# Altium PCB mother1.PcbDoc
Units mm, origin at the board's own origin, x right, y up, seen from the top; angles counter-clockwise.
Board outline 189.99 x 140.08 mm, 3 copper layers (Top Layer, Mid-Layer 24, Bottom Layer); 74 components, 76 nets, 310 pads, 0 vias.
Unrouted connection lines stored in the file: 148.
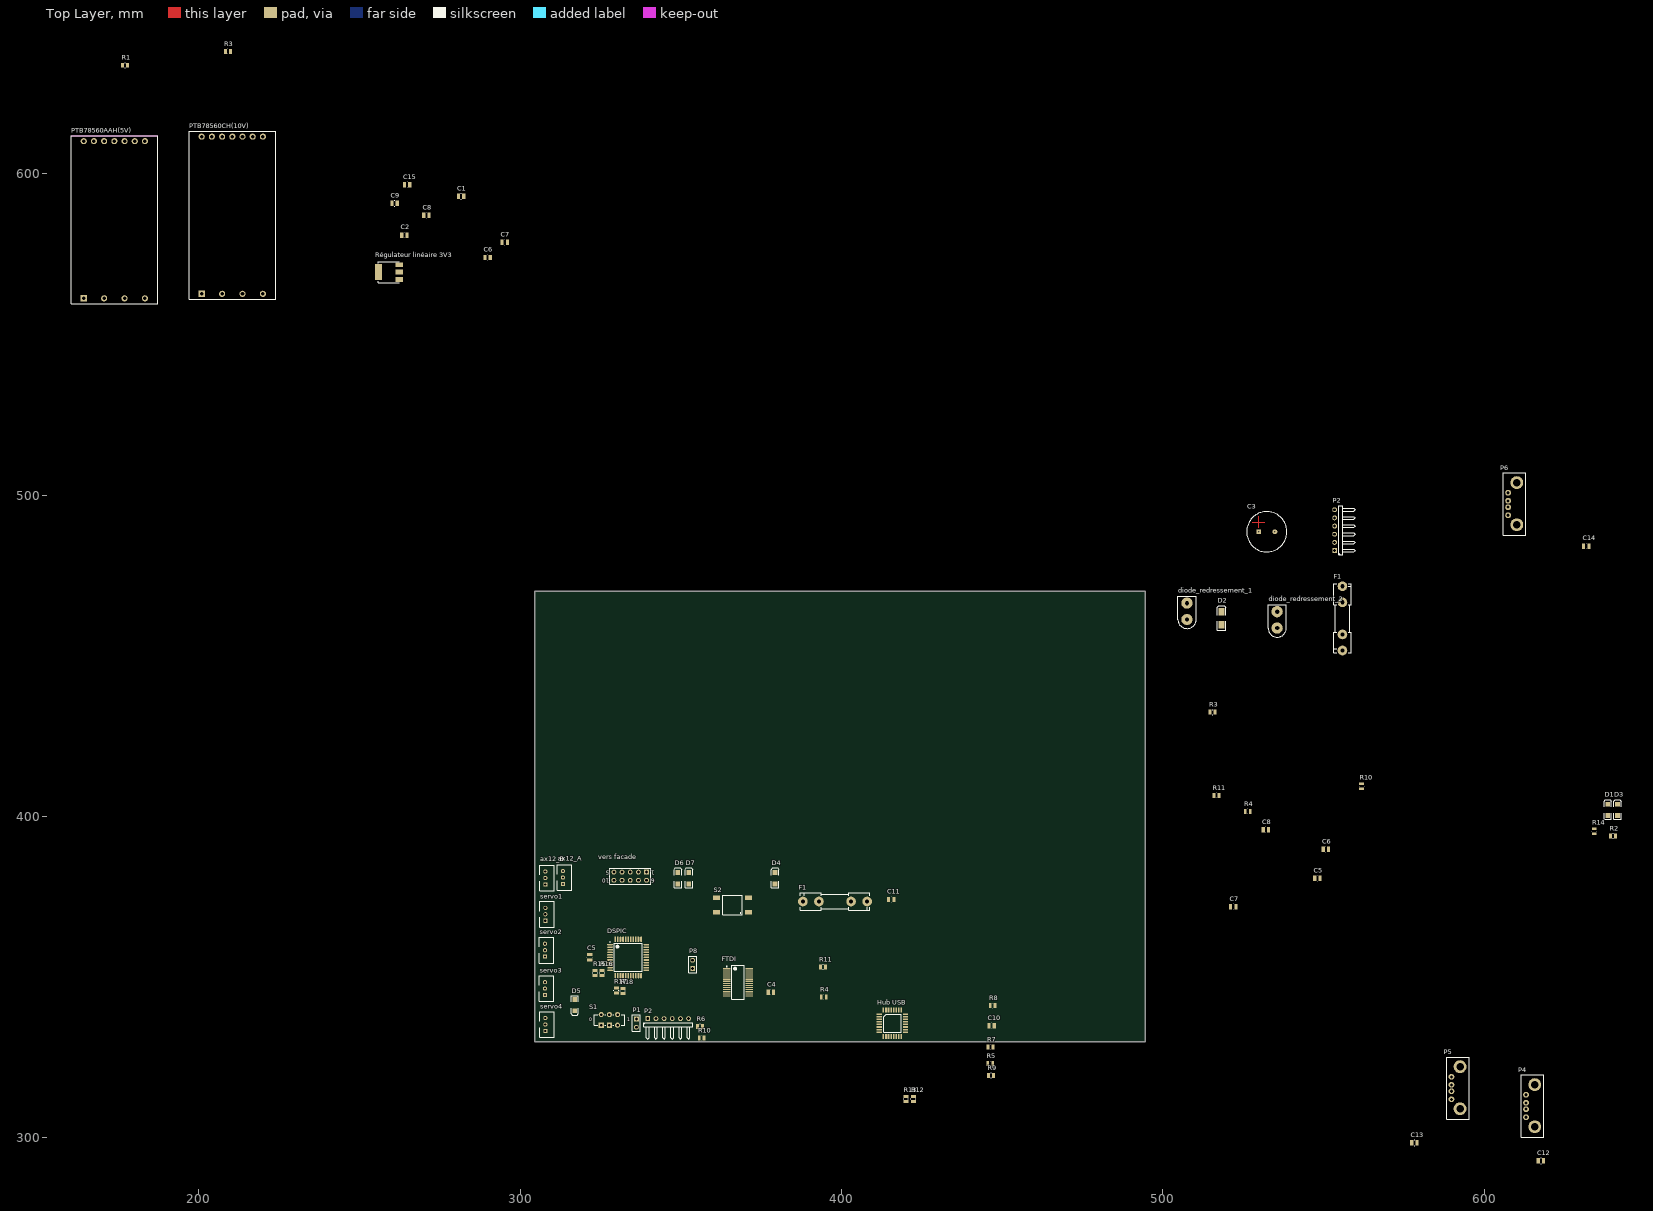
[diagram p0: Top Layer view]
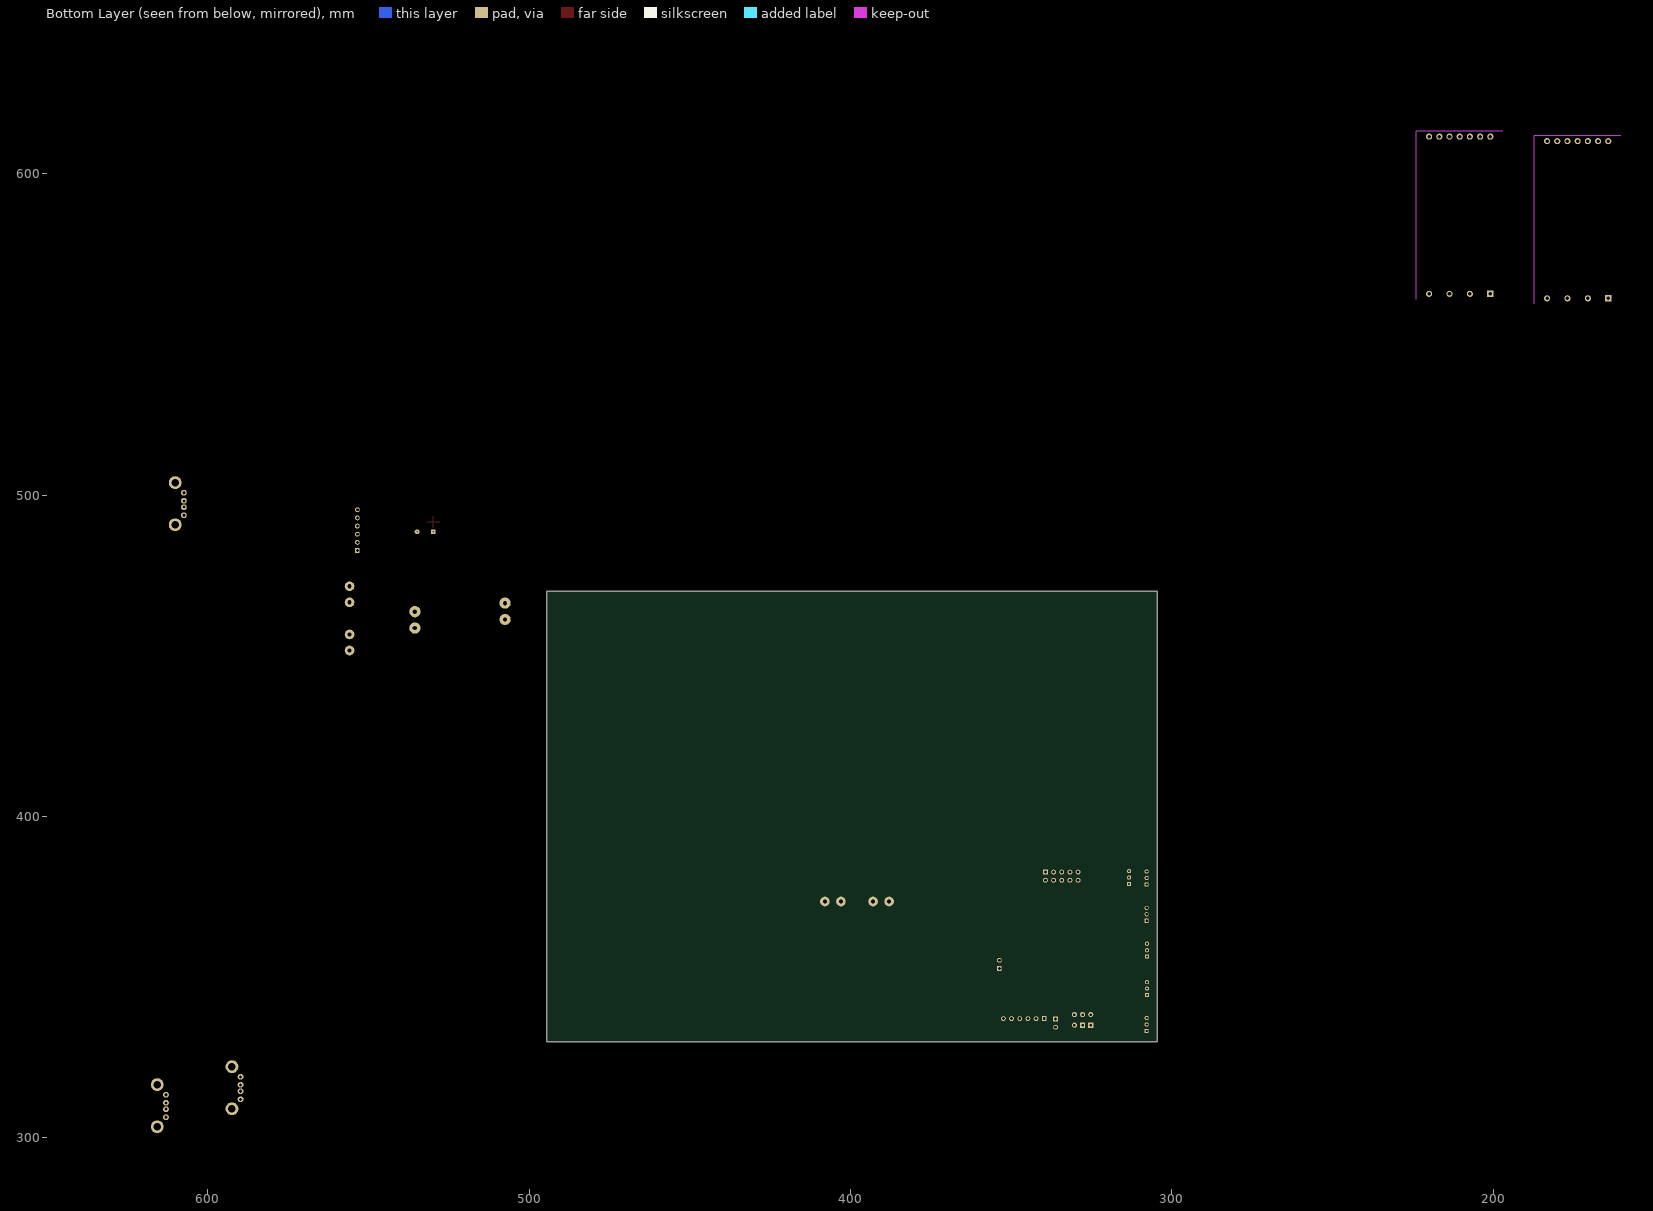
[diagram p1: Bottom Layer view, seen from below]
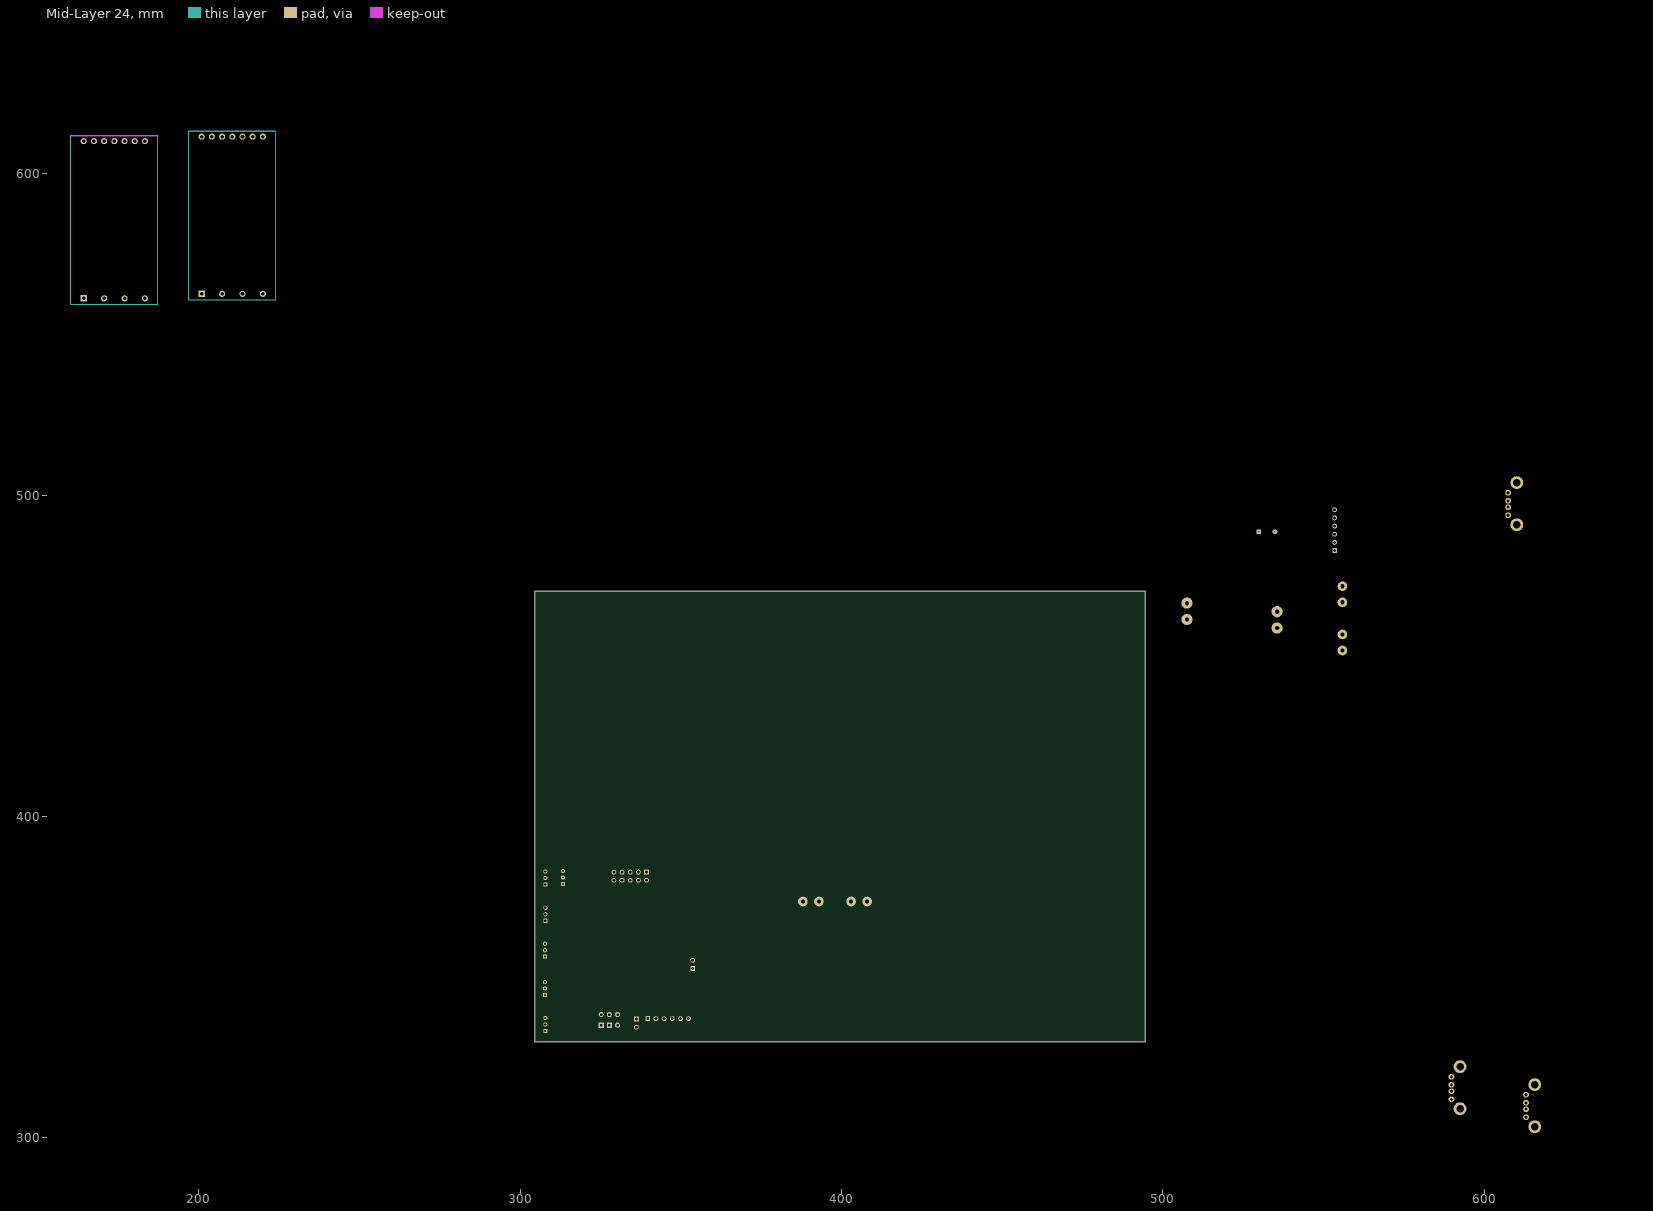
[diagram p2: Mid-Layer 24]

## Layer stack, top to bottom
Top Layer: signal copper 0.0356
Dielectric: dielectric 0.32, FR-4, Dk 4.8
Mid-Layer 24: signal copper 0.0356
Dielectric: dielectric 0.32, FR-4, Dk 4.8
Bottom Layer: signal copper 0.0356

## Board outline
304.546,329.946 494.538,329.946 494.538,470.027 304.546,470.027

## Design rules (kind name [scope] priority, off if disabled: settings)
AssemblyTestPointUsage AssemblyTestPointUsage_1 [All] p2:
AssemblyTestpoint AssemblyTestpoint_1 [All] p2: testpointundercomponent=TRUE minsize=1.016 maxsize=2.54 preferedsize=1.524 minholesize=0 maxholesize=1.016 preferedholesize=0.813 testpointgrid=0.025 usegrid=TRUE gridtolerance=0 allowsidetop=TRUE allowsidebottom=TRUE
Clearance [All] p1: gap=0.2
ComponentClearance ComponentClearance_1 [All] p2: gap=0.254 collisioncheckmode=3 verticalgap=0.254 showdistances=FALSE
DiffPairsRouting DiffPairsRouting_1 [All] p2: maxlimit=0.254 minlimit=0.254 mostfreqgap=0.254 maxuncoupledlength=12.7
FabricationTestPointUsage TestPointUsage [All] p2: valid=0 allowmultiple=FALSE
FabricationTestpoint Testpoint [All] p2: side=3 testpointundercomponent=TRUE minsize=1.016 maxsize=2.54 preferedsize=1.524 minholesize=0 maxholesize=1.016 preferedholesize=0.813 testpointgrid=0.025 allowsidetop=TRUE allowsidebottom=TRUE usegrid=TRUE gridtolerance=0
FanoutControl Fanout_LCC [IsLCC] p1: bgadir=Out bgaviamode=Centered fanoutstyle=Auto fanoutdirection=Alternating viagrid=0.025 // Fanout_LCC (Default Rule)
FanoutControl Fanout_BGA [IsBGA] p2: bgadir=Out bgaviamode=Centered fanoutstyle=Auto fanoutdirection=Alternating viagrid=0.025 // Fanout_BGA (Default Rule)
FanoutControl Fanout_Small [(CompPinCount < 5)] p3: bgadir=Out bgaviamode=Centered fanoutstyle=Auto fanoutdirection=OutThenIn viagrid=0.025 // Fanout_Small (Default Rule)
FanoutControl Fanout_SOIC [IsSOIC] p4: bgadir=Out bgaviamode=Centered fanoutstyle=Auto fanoutdirection=Alternating viagrid=0.025 // Fanout_SOIC (Default Rule)
FanoutControl Fanout_BGA_1 [IsBGA] p6: bgadir=Out bgaviamode=Centered fanoutstyle=Auto fanoutdirection=Alternating viagrid=0.025 // Fanout_BGA (Default Rule)
FanoutControl Fanout_LCC_1 [IsLCC] p7: bgadir=Out bgaviamode=Centered fanoutstyle=Auto fanoutdirection=Alternating viagrid=0.025 // Fanout_LCC (Default Rule)
FanoutControl Fanout_SOIC_1 [IsSOIC] p8: bgadir=Out bgaviamode=Centered fanoutstyle=Auto fanoutdirection=Alternating viagrid=0.025 // Fanout_SOIC (Default Rule)
FanoutControl Fanout_Small_1 [(CompPinCount < 5)] p9: bgadir=Out bgaviamode=Centered fanoutstyle=Auto fanoutdirection=OutThenIn viagrid=0.025 // Fanout_Small (Default Rule)
FanoutControl Fanout_Default_1 [All] p10: bgadir=Out bgaviamode=Centered fanoutstyle=Auto fanoutdirection=Alternating viagrid=0.025 // Fanout_Default (Default Rule)
Height Height_1 [All] p2: minheight=0 maxheight=25.4 prefheight=12.7
HoleSize HoleSize_1 [All] p2: absolutevalues=TRUE maxlimit=2.54 minlimit=0.025 maxpercent=80.000 minpercent=20.000
HoleToHoleClearance HoleToHoleClearance_1 [All] p2: gap=0.254 allowstackedmicrovias=TRUE
LayerPairs LayerPairs_1 [All] p2: enforce=TRUE
MinimumSolderMaskSliver MinimumSolderMaskSliver_1 [All] p2: minsoldermaskwidth=0.254
NetAntennae NetAntennae_1 [All] p2: netantennaetolerance=0
PasteMaskExpansion PasteMaskExpansion_1 [All] p2: expansion=0
PlaneClearance PlaneClearance_1 [All] p2: clearance=0.508
PolygonConnect [All] p1: connectstyle=Relief reliefconductorwidth=0.254 reliefentries=4 polygonreliefangle="90 Angle"
PolygonConnect PolygonConnect_1 [All] p2: connectstyle=Relief reliefconductorwidth=0.254 reliefentries=4 polygonreliefangle="90 Angle"
RoutingLayers [All] p1: top layer_v5=TRUE mid layer 24_v5=FALSE bottom layer_v5=TRUE
RoutingPriority RoutingPriority_1 [All] p2: routingpriority=0
RoutingTopology RoutingTopology_1 [All] p2: topology=Shortest
RoutingVias [All] p1: holewidth=0.5 width=1 viastyle="Through Hole" minholewidth=0.711 minwidth=1.27 maxholewidth=0.711 maxwidth=1.27
ShortCircuit ShortCircuit_1 [All] p2: allowed=FALSE
SilkToSilkClearance SilkToSilkClearance_1 [All] p2: silktosilkclearance=0.254
SilkscreenOverComponentPads [All] p1: minsilkscreentomaskgap=0.254
SilkscreenOverComponentPads SilkscreenOverComponentPads_1 [All] p2: minsilkscreentomaskgap=0.254
SolderMaskExpansion [All] p1: expansion=0.102
SolderMaskExpansion SolderMaskExpansion_1 [All] p2: expansion=0.102
UnRoutedNet UnRoutedNet_1 [All] p2:
Width [All] p1: maxlimit=0.2 minlimit=0.2 preferedwidth=0.2
22 further rules are at their usual default settings.

## Classes and differential pairs
component class U_mother1-pic: ax12_A ax12_B C4 C5 C6 C7 C8 C9 C11 D1 D2 D3 D4 D5 D6 DSPIC F1 FTDI P2 P8 R2 R3 R4 R10 R11 R14 R15 R16 R17 R18 "Régulateur linéaire 3V3" S1 S2 servo1 servo2 servo3 servo4 "vers facade"
component class mother1: C1 C2 C3 C5 C6 C10 C12 C13 C14 C15 diode_redressement_1 diode_redressement_2 F1 "Hub USB" P1 P2 P4 P5 P6 "Power distribution USB" PTB78560AAH(5V) PTB78560CH(10V) R1 R3 R4 R5 R6 R7 R8 R9 R10 R11 R12 R13

## Components (designator, comment, footprint, x,y, rotation, side; value= is the part's Value field where it differs from the comment)
ax12_A "JST" B3B-PH-K-S 313.309,378.968 r90 top
ax12_B "JST" B3B-PH-K-S 307.848,378.841 r90 top
C1 "CAP" C0805C 280.797,592.963 r0 top
C2 "CAP" C0805C 263.144,580.898 r0 top
C3 "CAP POL" "Capacitor axial leaded" 529.844,488.569 r0 top
C4 "" C0805C 377.19,345.313 r0 top
C5 "" C0805C 321.691,355.346 r90 top
C5 "" C0805C 547.243,380.746 r0 top
C6 "" C0805C 289.052,573.913 r0 top
C6 "" C0805C 549.91,389.763 r0 top
C7 "" C0805C 294.386,578.612 r0 top
C7 "" C0805C 521.081,371.856 r0 top
C8 "" C0805C 270.002,586.994 r0 top
C8 "" C0805C 531.241,395.859 r0 top
C9 "" C0805C 260.096,590.804 r0 top
C10 "CAP" C0805C 445.897,334.899 r0 top
C11 "CAP" C0805C 414.655,374.142 r0 top
C12 "CAP" C0805C 616.839,292.862 r0 top
C13 "CAP" C0805C 577.469,298.45 r0 top
C14 "CAP" C0805C 630.936,484.124 r0 top
C15 "CAP" C0805C 264.033,596.519 r0 top
D1 "LED2" LED1206G 638.439,402.011 r90 top
D2 "ZENER/5.6V" DSO-C2/X1.8 518.287,461.645 r90 top
D3 "LED2" LED1206Y 641.447,402.011 r90 top
D4 "LED2" LED1206Y 379.349,380.746 r90 top
D5 "LED2" LED1206R 316.992,341.249 r270 top
D6 "LED2" LED1206R 349.069,380.746 r90 top
D7 "LED2" LED1206R 352.498,380.746 r90 top (schematic designator D6)
diode_redressement_1 "Diode" "Diode axial lead \"folded\"" 507.492,461.264 r90 top
diode_redressement_2 "Diode" "Diode axial lead \"folded\"" 535.559,458.597 r90 top
DSPIC "DSPIC33FJ64MC804-I/PT" TQFP-PT44_N 333.629,356.108 r0 top
F1 "200mA" "Fuse Holder 5x20mm" 387.985,373.507 r0 top
F1 "200mA" "Fuse Holder 5x20mm" 555.879,451.612 r90 top
FTDI "FT232RL" SSOP-28_M 367.792,348.361 r0 top
"Hub USB" "TUSB2046BVF" TUSB2046BVF 411.734,338.455 r0 top
P1 "Header 2" HDR1X2 336.169,336.931 r270 top
P2 "PICkit" HDR1X6H 339.725,337.058 r0 top
P2 "PICkit" HDR1X6H 553.466,482.727 r90 top
P4 "USB" "USB SM female vertical" 613.029,309.88 r90 top
P5 "USB" "USB SM female vertical" 589.788,315.468 r90 top
P6 "USB" "USB SM female vertical" 607.441,497.205 r90 top
P8 "Header 2/Spy" HDR1X2 353.695,352.679 r90 top
PTB78560AAH(5V) "PTB78560x" PTB78560x 164.211,561.213 r90 top
PTB78560CH(10V) "PTB78560x" PTB78560x 200.914,562.61 r90 top
R1 "RES" C0805R 176.276,633.73 r0 top
R2 "" C0805R 639.318,393.954 r0 top
R3 "" C0805R 208.28,638.048 r0 top
R3 "" C0805R 514.708,432.433 r0 top
R4 "" C0805R 393.7,343.789 r0 top
R4 "" C0805R 525.653,401.574 r0 top
R5 "RES" C0805R 445.516,323.088 r0 top
R6 "RES" C0805R 355.219,334.645 r0 top
R7 "RES" C0805R 445.643,328.168 r0 top
R8 "RES" C0805R 446.278,341.122 r0 top
R9 "RES" C0805R 445.77,319.405 r0 top
R10 "" C0805R 355.727,331.089 r0 top
R10 "" C0805R 561.855,408.602 r90 top
R11 "" C0805R 393.446,353.187 r0 top
R11 "" C0805R 515.874,406.527 r0 top
R12 "RES" C0805R 422.334,311.32 r90 top
R13 "RES" C0805R 420.073,311.32 r90 top
R14 "" C0805R 634.238,394.589 r90 top
R15 "" C0805R 323.342,350.52 r90 top
R16 "" C0805R 325.501,350.52 r90 top
R17 "" C0805R 329.946,345.059 r90 top
R18 "" C0805R 331.978,344.932 r90 top
"Régulateur linéaire 3V3" "LM2937IMP-3.3" SOT223 262.382,567.055 r90 top
S1 "SW-DPDT/Reset" MCLSS22 327.787,335.026 r0 top
S2 "SPST-NO/RC2" SPST-NO 371.094,370.205 r90 top
servo1 "JST" B3B-PH-K-S 307.848,367.538 r90 top
servo2 "JST" B3B-PH-K-S 307.721,356.362 r90 top
servo3 "JST" B3B-PH-K-S 307.721,344.424 r90 top
servo4 "JST" B3B-PH-K-S 307.848,333.248 r90 top
"vers facade" "IDC 10" HDR2X5_CEN 339.344,382.651 r180 top

## Footprints (in the part's own frame and the unit in brackets; to place one, negate y for a bottom-side part, rotate by r counter-clockwise, add the part's x,y. Pads: shape width x height; smd on the part's side, far side on the other; paste and mask are expansions set on the pad)
B3B-PH-K-S [mm] "JST Header 3 pins Straight"
  rect 1.3x1.3 hole 0.7: 1(0,0)
  round 1.3 hole 0.7: 2(2,0) 3(4,0)
  silkscreen extent -2,-2.8 6,1.7, body extent -1.95,-2.8 5.95,1.7, height 6
C0805C [mm]
  rect 1x1.7 smd: 1(0,0) 2(1.65,0)
  silkscreen extent 0.8,-0.89 0.85,0.89, body extent -0.21,-0.61 1.79,0.64, height 0.78
C0805R [mm]
  rect 0.9x1.55 smd: 1(0,0) 2(1.55,0)
  silkscreen extent 0.73,-0.76 0.81,0.76, body extent -0.24,-0.62 1.76,0.63, height 0.78
"Capacitor axial leaded" [mil] "height x diam 20mm x 12.5mm"
  rect 60x60 hole 19.68: 0(0,0)
  round 60 hole 19.68: 0(196.85,0)
  Top Layer lines w10: -76.77,118.11 72.83,118.11 ; 0,51.18 0,187.01
  silkscreen extent -148,-246 345,246, body extent -148,-246 343,246, height 788
"Diode axial lead \"folded\"" [mm]
  round 3.5 hole 1.35: 1(0,0) 2(5.1,0)
  silkscreen extent -2.81,-2.85 7.25,2.8, body extent -2.8,-2.8 5.74,2.8, height 15.69
DSO-C2/X1.8 [mm] "Diode; DO-214-AC/SMA; 2 C-Bend Leads; Body 5 x 2.7 mm, inc. leads (LxW)"
  rect 2.4x1.8 smd: A(2.05,0) K(-2.05,0)
  silkscreen extent -3.65,-1.3 3.95,1.3, body extent -2.74,-1.4 2.74,1.4, height 2.28
"Fuse Holder 5x20mm" [mm] "Schurter Fuse Holder 0751.0110"
  round 3 hole 1.3: 1(0,0) 1(5,0) 2(15,0) 2(20,0)
  silkscreen extent -0.75,-2.75 20.75,2.75, body extent 0,-2.5 20,2.5, height 6.4
HDR1X2 [mm] "Connector; Header; 2 Position"
  rect 1.5x1.5 hole 0.9: 1(0,0)
  round 1.5 hole 0.9: 2(2.54,0)
  silkscreen extent -1.27,-1.27 3.81,1.27, body extent -1.27,-1.27 3.81,1.27, height 8.45
HDR1X6H [mm] "Connector; Header; 6 Position; Right Angle"
  rect 1.5x1.5 hole 0.9: 1(0,0)
  round 1.5 hole 0.9: 2(2.54,0) 3(5.08,0) 4(7.62,0) 5(10.16,0) 6(12.7,0)
  silkscreen extent -1.27,-6.35 13.97,-1.27, body extent -1.27,-10.15 13.97,0.32, height 3.08
HDR2X5_CEN [mm] "Connector; Header; 5x2 Position"
  rect 1.5x1.5 hole 0.9: 1(0,0)
  round 1.5 hole 0.9: 2(2.54,0) 3(5.08,0) 4(7.62,0) 5(10.16,0) 6(0,2.54) 7(2.54,2.54) 8(5.08,2.54) 9(7.62,2.54) 10(10.16,2.54)
  silkscreen extent -1.27,-1.27 11.43,3.81, body extent -5.15,-3.3 15.35,6, height 2.2
LED1206G [mm] "SMT LED; 2 Flat Leads; 3.2X1.6X1.1"
  rect 1.5x1.5 smd: 1(-1.75,0) 2(1.75,0)
  silkscreen extent -2.9,-1.15 3.2,1.15, body extent -1.6,-0.8 1.6,0.8, height 1.11
LED1206R [mm] "SMT LED; 2 Flat Leads; 3.2X1.6X1.1"
  rect 1.5x1.5 smd: 1(-1.75,0) 2(1.75,0)
  silkscreen extent -2.9,-1.15 3.2,1.15, body extent -1.6,-0.8 1.6,0.8, height 1.11
LED1206Y [mm] "SMT LED; 2 Flat Leads; 3.2X1.6X1.1"
  rect 1.5x1.5 smd: 1(-1.75,0) 2(1.75,0)
  silkscreen extent -2.9,-1.15 3.2,1.15, body extent -1.6,-0.8 1.6,0.8, height 1.11
MCLSS22 [mm] "Slide Switch DPDT"
  rect 1.6x1.6 hole 0.8: 1(0,0) 2(-2.54,0)
  round 1.6 hole 0.8: 3(2.54,0) 4(0,3.3) 5(-2.54,3.3) 6(2.54,3.3)
  silkscreen extent -4.7,0 4.7,3.3, body extent -4.7,-2 4.7,3.3, height 3.5
PTB78560x [mm] "PTB78560x Texas Instruments Regulator"
  rect 1.905x1.905 hole 1.1: 1(0,0)
  round 1.905 hole 1.1: 2(0,-6.35) 3(0,-12.7) 4(0,-19.05) 5(48.895,-19.05) 6(48.895,-15.875) 7(48.895,-12.7) 8(48.895,-9.525) 9(48.895,-6.35) 10(48.895,-3.175) 11(48.895,0)
  Mid-Layer 24 lines w0.2: -1.778,4 -1.778,-23.05 50.673,-23.05 50.673,4.001 -1.778,4
  Keep-Out Layer lines w0.2: 50.609,3.937 50.609,-22.987 -1.714,-22.987
  silkscreen extent -1.71,-22.99 50.61,3.94, body extent -1.71,-22.99 50.61,3.94, height 10
SOT223 [mm]
  rect 1.5x2.2 smd: 1(0,0) 2(2.3,0) 3(4.6,0)
  rect 5x2.2 smd: ""(2.3,6.5)
  silkscreen extent -1,0 5.6,6.6, body extent -0.95,-0.2 5.55,6.8, height 1.64
SPST-NO [mm] "Tactile Switch SPST-NO 6x6mm"
  rect 1.4x2.1 smd: 1(0,0) 2(4.5,0) 3(4.5,10) 4(0,10)
  silkscreen extent -0.75,2 5.25,8, body extent -0.75,0.93 5.25,9.08, height 5
SSOP-28_M [mm] "SOP, 28-Leads, Body 10.2x5.3mm, Pitch 0.65mm, IPC Low Density"
  oval 2.4x0.35 smd: 1(-3.5,4.225) 2(-3.5,3.575) 3(-3.5,2.925) 4(-3.5,2.275) 5(-3.5,1.625) 6(-3.5,0.975) 7(-3.5,0.325) 8(-3.5,-0.325) 9(-3.5,-0.975) 10(-3.5,-1.625) 11(-3.5,-2.275) 12(-3.5,-2.925) 13(-3.5,-3.575) 14(-3.5,-4.225) 15(3.5,-4.225) 16(3.5,-3.575) 17(3.5,-2.925) 18(3.5,-2.275) 19(3.5,-1.625) 20(3.5,-0.975) 21(3.5,-0.325) 22(3.5,0.325) 23(3.5,0.975) 24(3.5,1.625) 25(3.5,2.275) 26(3.5,2.925) 27(3.5,3.575) 28(3.5,4.225)
  silkscreen extent -3.62,-5.25 1.9,5.25, body extent -3.91,-5.1 3.91,5.1, height 1.98
TQFP-PT44_N [mm] "Thin QFP, 44-Leads, Body 10x10mm, Pitch 0.8mm, IPC Medium Density"
  oval 1.75x0.5 smd: 1(-5.65,4) 2(-5.65,3.2) 3(-5.65,2.4) 4(-5.65,1.6) 5(-5.65,0.8) 6(-5.65,0) 7(-5.65,-0.8) 8(-5.65,-1.6) 9(-5.65,-2.4) 10(-5.65,-3.2) 11(-5.65,-4) 23(5.65,-4) 24(5.65,-3.2) 25(5.65,-2.4) 26(5.65,-1.6) 27(5.65,-0.8) 28(5.65,0) 29(5.65,0.8) 30(5.65,1.6) 31(5.65,2.4) 32(5.65,3.2) 33(5.65,4)
  oval 0.5x1.75 smd: 12(-4,-5.65) 13(-3.2,-5.65) 14(-2.4,-5.65) 15(-1.6,-5.65) 16(-0.8,-5.65) 17(0,-5.65) 18(0.8,-5.65) 19(1.6,-5.65) 20(2.4,-5.65) 21(3.2,-5.65) 22(4,-5.65) 34(4,5.65) 35(3.2,5.65) 36(2.4,5.65) 37(1.6,5.65) 38(0.8,5.65) 39(0,5.65) 40(-0.8,5.65) 41(-1.6,5.65) 42(-2.4,5.65) 43(-3.2,5.65) 44(-4,5.65)
  silkscreen extent -5.77,-4.35 4.35,4.95, body extent -6,-6 6,6, height 1.05
TUSB2046BVF [mil] "TI 4-Port USB Hub"
  rect 63x19.7 smd: 1(0,0) 2(0,-31.5) 3(0,-63) 4(0,-94.5) 5(0,-125.9) 6(0,-157.4) 7(0,-188.9) 8(0,-220.4) 17(322.8,-220.4) 18(322.8,-188.9) 19(322.8,-157.4) 20(322.8,-125.9) 21(322.8,-94.5) 22(322.8,-63) 23(322.8,-31.5) 24(322.8,0)
  rect 19.7x63 smd: 9(51.2,-271.6) 10(82.7,-271.6) 11(114.2,-271.6) 12(145.7,-271.6) 13(177.1,-271.6) 14(208.6,-271.6) 15(240.1,-271.6) 16(271.6,-271.6) 25(271.6,51.2) 26(240.1,51.2) 27(208.6,51.2) 28(177.1,51.2) 29(145.7,51.2) 30(114.2,51.2) 31(82.7,51.2) 32(51.2,51.2)
  silkscreen extent 53,-218 270,-2, body extent -16,-287 339,67, height 59
"USB SM female vertical" [mm] "USB SM female vertical"
  round 4 hole 2.3: 1(-6.45,-2.7) 6(6.65,-2.7)
  round 1.8 hole 0.95: 2(-3.5,0) 3(-1,0) 4(1,0) 5(3.5,0)
  silkscreen extent -9.65,-5.5 9.65,1.45, body extent -7.99,-4.99 7.99,2.65, height 13.2

## Part data
ax12_A ax12_B servo1 servo2 servo3 servo4: library part "Header 3", "Header, 3-Pin"
C1 C2 C10 C11 C12 C13 C14 C15: "Capacitor"
C3: "Polarized Capacitor"
C4 C5 C6 C7 C7 C8 C8 C9: library part "Cap Semi", "Capacitor (Semiconductor SIM Model)"
C5 C6: library part CAP, "Capacitor"
D1 D3 D4 D5 D6 D7: "Typical RED, GREEN, YELLOW, AMBER GaAs LED"
D2: library part ZENER, "ZENER"
diode_redressement_1 diode_redressement_2: "Default Diode"
DSPIC: "High-Performance 16-bit Digital Signal Controller, 64 KB Flash, 16 KB RAM, 44-Pin TQFP, Industrial Temperature"
F1 F1: library part FUSE1
FTDI: "USB UART Asynchronous Serial Data Transfer Chip, SSOP-28, Tube"
"Hub USB": "TUSB2046BVF 4-Port USB Hub"
P1: "Header, 2-Pin"
P2: library part "Header ICSP", "Header, 6-Pin, Right Angle"
P2 P4 P5 P6: library part "USB Con", "USB Connector"
P8: library part "Header 2", "Header, 2-Pin"
PTB78560AAH(5V) PTB78560CH(10V): "PTB78560x Texas Instruments Regulator"
R1 R5 R6 R7 R8 R9 R12 R13: "Resistor"
R2 R3 R4 R10 R11 R14 R15 R16 R17 R18: library part Res3, "Resistor"
R3 R4 R10 R11: library part RES, "Resistor"
"Régulateur linéaire 3V3": "500 mA Low Dropout Regulator"
S1: library part SW-DPDT, "Double-Pole, Double-Throw Switch"
S2: library part SPST-NO, "Tactile Switch 7.3mm, SMD"
"vers facade": "Header, 5-Pin, Dual row"

## Nets (pads, with @x,y where several pads share a name; then routed paths per layer and width w, separated by ;. In a path a pad name is that pad's centre, name@x,y a point inside that pad or via, vN(x,y) a via of type N, cw(c..) or ccw(c..) an arc to the next point about the centre after c; other vN are vias at no path point)
+3V3: "Régulateur linéaire 3V3.3" C8.1@270.002,586.994 C9.1 D1.1 DSPIC.17 DSPIC.28 DSPIC.40 FTDI.4 R2.2
+5V0: "Hub USB.3" "Hub USB.25" C2.1 C10.1 P1.2 PTB78560AAH(5V).9 PTB78560AAH(5V).10 R15.1 R16.1 R17.1 R18.1 servo1.1 servo2.1 servo3.1 servo4.1
"+5V0 (ISOLé)": "Régulateur linéaire 3V3.1" C7.1@294.386,578.612 F1.1@387.985,373.507 F1.1@392.985,373.507 FTDI.20
+10V0: C6.1@289.052,573.913 PTB78560CH(10V).9 PTB78560CH(10V).10
+30V: C1.2 C15.2 PTB78560AAH(5V).1 PTB78560CH(10V).1
"ARRET URG": "vers facade.9" DSPIC.44
CLK12: DSPIC.30 FTDI.12
D+: FTDI.15
D-: FTDI.16
"DATA AX12": ax12_A.2 ax12_B.2 DSPIC.5
"DATA SERVO1": DSPIC.10 R15.2 servo1.2
"DATA SERVO2": DSPIC.11 R16.2 servo2.2
"DATA SERVO3": DSPIC.14 R17.2 servo3.2
"DATA SERVO4": DSPIC.15 R18.2 servo4.2
DM0: P2.2@342.265,337.058 R6.1
DM3: P5.2 R9.2
DM4: P6.2 R7.2
DP0: 
DP1: 
DP2: P4.3 R13.1
DP3: P5.3 R8.2
DP4: P6.3 R5.2
FLUSH: DSPIC.24 FTDI.6
GND: "Hub USB.7" "Hub USB.8" "Hub USB.28" "Régulateur linéaire 3V3.2" "vers facade.10" ax12_A.3 ax12_B.3 C1.1 C2.2 C4.1 C5.2@321.691,356.996 C6.2@290.702,573.913 C7.2@296.036,578.612 C8.2@271.652,586.994 C9.2 C10.2 C11.1 C12.1 C13.1 C14.1 C15.1 DSPIC.6 DSPIC.16 DSPIC.29 DSPIC.39 FTDI.7 FTDI.18 FTDI.21 FTDI.25 FTDI.26 P2.3@344.805,337.058 P4.4 P5.4 P6.4 PTB78560AAH(5V).3 PTB78560AAH(5V).4 PTB78560AAH(5V).6 PTB78560AAH(5V).7 PTB78560CH(10V).3 PTB78560CH(10V).4 PTB78560CH(10V).6 PTB78560CH(10V).7 R1.1 R14.1 S1.4 S2.2 servo1.3 servo2.3 servo3.3 servo4.3
GPIO: FTDI.13 R4.1@393.7,343.789
LED1: "vers facade.6" DSPIC.1
LED2: "vers facade.7" DSPIC.8
LED3: "vers facade.8" DSPIC.9
MCLR: DSPIC.18 S1.6
NetC4_2: C4.2 FTDI.17
NetC5_1: C5.1@321.691,355.346 DSPIC.7
NetD1_2: D1.2 R14.2
NetD3_1: D3.1 R2.1
NetD4_1: D4.1 R3.1@208.28,638.048
NetD5_1: D5.1 DSPIC.13
NetD5_2: D5.2 R10.1@355.727,331.089
NetD6_1: D6.1 D7.1 DSPIC.32
NetD6_2: D6.2 D7.2 R11.1@393.446,353.187
Netdiode_redressement_1_2: diode_redressement_1.2 diode_redressement_2.2
NetDSPIC_27: DSPIC.27 S2.3
"NetHub USB_1": "Hub USB.1" R4.2@395.25,343.789
"NetHub USB_2": "Hub USB.2" R6.2
"NetHub USB_11": "Hub USB.11" R10.2@357.277,331.089
"NetHub USB_12": "Hub USB.12" R11.2@394.996,353.187
"NetHub USB_15": "Hub USB.15" R12.2
"NetHub USB_16": "Hub USB.16" R13.2
"NetHub USB_19": "Hub USB.19" R9.1
"NetHub USB_20": "Hub USB.20" R8.1
"NetHub USB_23": "Hub USB.23" R7.1
"NetHub USB_24": "Hub USB.24" R5.1
NetP1_1: P1.1 P2.1@339.725,337.058
NetPTB78560AAH(5V)_8: PTB78560AAH(5V).8 R1.2
NetPTB78560CH(10V)_8: PTB78560CH(10V).8 R3.2@209.83,638.048
OUT1: C11.2 F1.2@402.985,373.507 F1.2@407.985,373.507
OUT2: C12.2 P4.1
OUT3: C13.2 P5.1
OUT4.: C14.2 P6.1
OVRCUR1: "Hub USB.9"
OVRCUR2: "Hub USB.14"
OVRCUR3: "Hub USB.18"
OVRCUR4: "Hub USB.22"
PGEC: DSPIC.22 P2.5@349.885,337.058
PGED: DSPIC.21 P2.4@347.345,337.058
PWRON1: "Hub USB.10"
PWRON2: "Hub USB.13"
PWRON3: "Hub USB.17"
PWRON4: "Hub USB.21"
RTS: DSPIC.23 FTDI.11
RX: DSPIC.26 FTDI.1 P8.2
RXLED: D3.2 FTDI.23
"START LAISSE": "vers facade.5" DSPIC.43
SWITCH1: "vers facade.2" DSPIC.33
SWITCH2: "vers facade.3" DSPIC.41
SWITCH3: "vers facade.4" DSPIC.42
TX: DSPIC.25 FTDI.5 P8.1
TXLED: D4.2 FTDI.22
pads on no net: "Hub USB.4" "Hub USB.5" "Hub USB.6" "Hub USB.26" "Hub USB.27" "Hub USB.29" "Hub USB.30" "Hub USB.31" "Hub USB.32" "Régulateur linéaire 3V3." "vers facade.1" ax12_A.1 ax12_B.1 C3.0 C5.1@547.243,380.746 C5.2@548.893,380.746 C6.1@549.91,389.763 C6.2@551.56,389.763 C7.1@521.081,371.856 C7.2@522.731,371.856 C8.1@531.241,395.859 C8.2@532.891,395.859 D2.A D2.K diode_redressement_1.1 diode_redressement_2.1 DSPIC.2 DSPIC.3 DSPIC.4 DSPIC.12 DSPIC.19 DSPIC.20 DSPIC.31 DSPIC.34 DSPIC.35 DSPIC.36 DSPIC.37 DSPIC.38 F1.1@555.879,451.612 F1.1@555.879,456.612 F1.2@555.879,466.612 F1.2@555.879,471.612 FTDI.2 FTDI.3 FTDI.8 FTDI.9 FTDI.10 FTDI.14 FTDI.19 FTDI.24 FTDI.27 FTDI.28 P2.1@553.466,482.727 P2.2@553.466,485.267 P2.3@553.466,487.807 P2.4@553.466,490.347 P2.5@553.466,492.887 P2.6 P4.2 P4.5 P4.6 P5.5 P5.6 P6.5 P6.6 PTB78560AAH(5V).2 PTB78560AAH(5V).5 PTB78560AAH(5V).11 PTB78560CH(10V).2 PTB78560CH(10V).5 PTB78560CH(10V).11 R3.1@514.708,432.433 R3.2@516.258,432.433 R4.1@525.653,401.574 R4.2@527.203,401.574 R10.1@561.855,408.602 R10.2@561.855,410.152 R11.1@515.874,406.527 R11.2@517.424,406.527 R12.1 S1.1 S1.2 S1.3 S1.5 S2.1 S2.4

## Silkscreen, mask and mechanical layers (free items; w line width, h text height)
Mechanical 1:
  the board outline again, w0.254

## Text inside footprints (layer, text, board x,y; h text height)
S1: Top Overlay "1" at 333.287,336.176 h1; Top Overlay "0" at 321.537,336.176 h1
"vers facade": Top Overlay "1" at 341.884,383.159 h1.27 r180; Top Overlay "5" at 327.66,383.159 h1.27 r180; Top Overlay "10" at 327.66,380.619 h1.27 r180; Top Overlay "6" at 341.884,380.619 h1.27 r180